# EAGLE board rw-linear-20mm-mk-1.1.0 (EAGLE 7.5.0)
VERSION: v1.1
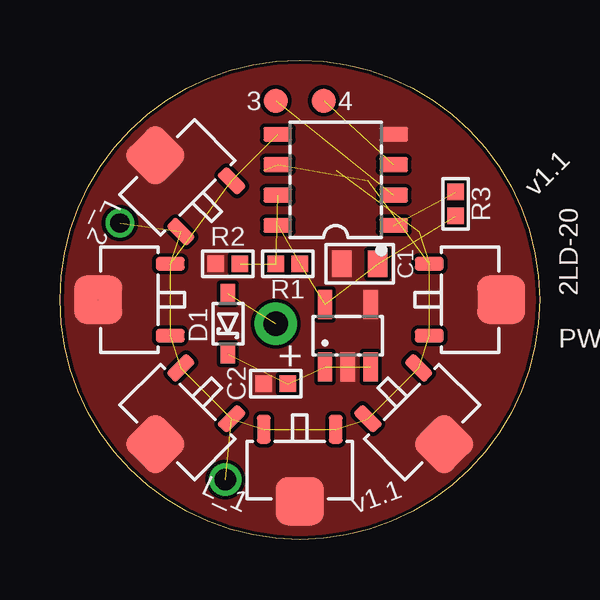
[diagram p0: board, top side]
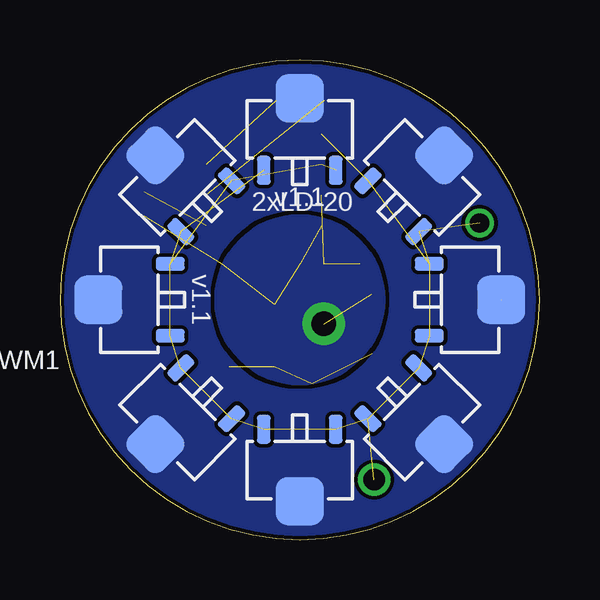
[diagram p1: board, bottom side, seen from below]

Size 20 x 20 mm. Coordinates in mm from the lower left corner, seen from the top.
Outline: 0,10 arc-180 20,10 arc-180 0,10
Copper layers (1*16): Top 0.0356mm / dielectric 1.5011mm / Bottom 0.0356mm
Design rules "LaenPCBOrder2": minimum track width 6mil, minimum drill 13mil, track to track 6mil, track to pad 6mil, pad to pad 6mil, via to via 6mil, smd to smd 6mil, copper to edge 6mil, drill to drill 6mil, minimum pad ring 7mil, minimum via ring 7mil, stop-mask expansion 3mil, vias tented up to drill 20mil, thermal gap 10mil

## Footprints (pad centres in the part's own frame; a part is rotated, then mirrored left to right if it is on the bottom)
1X01-SMD-1MM-DIA-NS = smd 1 x 1: P$1 0,0
1X01-1MM-CIR-NS = drill 1.016 pad 1.778: 1 0,0
C0603-TIGHTER = smd 0.8 x 1.1: 1 -0.75,0; 2 0.75,0
C0402 = smd 0.7 x 0.7: 1 -0.5,0; 2 0.5,0
SOD323-SCHOTTKY = smd 0.8 x 0.6: A -1.25,0; C 1.25,0
1X01-0.9MM-CIR = drill 0.9 pad 1.3: P$1 0,0
1X01-0.8MM-CIR = drill 0.8: 1 0,0
R0402 = smd 0.7 x 0.7: 1 -0.5,0; 2 0.5,0
SO08-NARROWER = smd 0.6 x 1.2: 1 -1.905,-2.416; 2 -0.635,-2.416; 3 0.635,-2.416; 4 1.905,-2.416; 5 1.905,2.416; 6 0.635,2.416; 7 -0.635,2.416; 8 -1.905,2.416
SOT89-NOTHERM-ROUNDED-LESS = smd 0.58 x 1.2: 1 -1.5,-1.7; 3 1.5,-1.7 | smd 2 x 2: 4 0,1.3
SOT23-5 = smd 0.6 x 1.2: 1 -0.95,-1.3; 2 0,-1.3; 3 0.95,-1.3; 4 0.95,1.3; 5 -0.95,1.3

## Placement (x,y rotation side)
3  M01SMD-1MM-DIA-NS  [1X01-SMD-1MM-DIA-NS]  9,18.3 0 top
4  M01SMD-1MM-DIA-NS  [1X01-SMD-1MM-DIA-NS]  11,18.3 0 top
+  M01PTH-1MM-CIR-NS  [1X01-1MM-CIR-NS]  9,9 90 top
C1  4u7  [C0603-TIGHTER]  12.5,11.5 180 top
C2  1u  [C0402]  9,6.5 180 top
D1  BAT165  [SOD323-SCHOTTKY]  7,9 270 top
FRAME1  FRAME-LETTERNO_PACKAGE  [DUMMY]  0,0 0 top
L_1  M011X01-0.9MM-CIR  [1X01-0.9MM-CIR]  6.9,2.5 270 top
L_2  M01PTH-0.8MM-CIR  [1X01-0.8MM-CIR]  2.5,13.2 180 top
R1  19K  [R0402]  9.5,11.5 0 top
R2  4K7  [R0402]  7,11.5 0 top
R3  10K  [R0402]  16.5,14 270 top
U1  Tiny25  [SO08-NARROWER]  11.5,15 90 top
U2  AMC7135  [SOT89-NOTHERM-ROUNDED-LESS]  4.9,15.1 45 top
U3  AMC7135  [SOT89-NOTHERM-ROUNDED-LESS]  4.9,4.9 135 top
U4  AMC7135  [SOT89-NOTHERM-ROUNDED-LESS]  10,2.9 180 top
U5  AMC7135  [SOT89-NOTHERM-ROUNDED-LESS]  15.1,4.9 225 top
U6  AMC7135  [SOT89-NOTHERM-ROUNDED-LESS]  17.1,10 270 top
U7  AMC7135  [SOT89-NOTHERM-ROUNDED-LESS]  10,17.1 0 bottom
U8  AMC7135  [SOT89-NOTHERM-ROUNDED-LESS]  15.1,15.1 45 bottom
U9  AMC7135  [SOT89-NOTHERM-ROUNDED-LESS]  17.1,10 90 bottom
U10  AMC7135  [SOT89-NOTHERM-ROUNDED-LESS]  15.1,4.9 135 bottom
U11  AMC7135  [SOT89-NOTHERM-ROUNDED-LESS]  10,2.9 180 bottom
U12  AMC7135  [SOT89-NOTHERM-ROUNDED-LESS]  4.9,4.9 225 bottom
U13  AMC7135  [SOT89-NOTHERM-ROUNDED-LESS]  2.9,10 270 bottom
U14  AMC7135  [SOT89-NOTHERM-ROUNDED-LESS]  4.9,15.1 315 bottom
U15  AMC7135  [SOT89-NOTHERM-ROUNDED-LESS]  2.9,10 90 top
U16  V_REG_SOT-23-5AP2112  [SOT23-5]  12,8.5 0 top

## Library data of the parts
3 4 + C1 C2 D1 L_1 L_2 R1-R3 U1-U16 = a_parts
FRAME1 = a_parts; DESIGNER: sean@yak.net; VERSION: v1.1

## Nets
3: 3.P$1 U1.2
4: 4.P$1 U1.3
BATT_DIV: R1.1 R2.2 U1.7
GND: C1.2 C2.2 R2.1 U1.4 U2.4 U3.4 U4.4 U5.4 U6.4 U7.4 U8.4 U9.4 U10.4 U11.4 U12.4 U13.4 U14.4 U15.4 U16.2 U16.4
LED1_K: L_1.P$1 U3.1 U4.1 U5.1 U6.1 U7.1 U8.1 U9.1 U10.1 U11.1 U12.1 U13.1 U14.1 U15.1
LED2_K: L_2.1 U2.1
N$1: R3.1 U1.1
PWM_1: U1.6 U3.3 U4.3 U5.3 U6.3 U7.3 U8.3 U9.3 U10.3 U11.3 U12.3 U13.3 U14.3 U15.3
PWM_2: U1.5 U2.3
VBAT: +.1 D1.A
VBAT_DC: C2.1 D1.C U16.1 U16.3
VCC: C1.1 R1.2 R3.2 U1.8 U16.5

## Tracks (layer width: path | path; a pad name or v marks a point on that pad's centre or on a via)
3  (1 unrouted)
4  (1 unrouted)
BATT_DIV  (2 unrouted)
GND  (1 unrouted)
  pour Top (isolate 0.152, rank 6, no thermals): 0,10 arc90 10,0 arc90 20,10 arc90 10,20 arc90
  pour Bottom (isolate 0.152, rank 6, no thermals): 20,10 arc-90 10,0 arc-90 0,10 arc-90 10,20 arc-90
LED1_K  (13 unrouted)
LED2_K  (1 unrouted)
N$1  (1 unrouted)
PWM_1  (13 unrouted)
PWM_2  (1 unrouted)
VBAT  (1 unrouted)
  pour Bottom (isolate 0.152, no thermals): 6.5,10 arc-180 13.5,10 arc-180
VBAT_DC  (3 unrouted)
VCC  (4 unrouted)

## Text on the board
tPlace: 2LD-20 | PWM1
bPlace: 2xLD-20 | PWM1